# EAGLE board CT_schematic (EAGLE 7.6.0)

Size 100 x 80 mm. Coordinates in mm from the lower left corner, seen from the top.
Outline: 0,0 100,0 100,80 0,80 0,0
Copper layers (1*16): Top 0.035mm / dielectric 1.5mm / Bottom 0.035mm
Design rules "default": minimum track width 10mil, minimum drill 24mil, track to track 8mil, track to pad 8mil, pad to pad 8mil, via to via 8mil, smd to smd 8mil, copper to edge 40mil, drill to drill 8mil, minimum pad ring 10mil, minimum via ring 8mil, stop-mask expansion 4mil, vias tented up to drill 0mil, thermal gap 10mil

## Footprints (pad centres in the part's own frame; a part is rotated, then mirrored left to right if it is on the bottom)
C0603 = smd 0.8 x 0.8: 1 -0.762,0; 2 0.762,0
C0402 = smd 0.5 x 0.5: 1 -0.508,0; 2 0.508,0
C0805 = smd 1.2 x 1.3: 1 -1.016,0; 2 1.016,0
C1210 = smd 1.2 x 2.5: 1 -1.524,0; 2 1.524,0
EXV-9H = smd 3.505 x 1.676: 1 -2.857,0; 2 2.857,0
L0603 = smd 0.8 x 0.8: 1 -0.762,0; 2 0.762,0
PJ-037B_PACKAGE = drill 3.7 square: 1 12,0 | drill 3.2 square: 2 6,0
R0603 = smd 0.8 x 0.8: 1 -0.762,0; 2 0.762,0
LQFP100 = smd 0.3 x 1.2: 1 -6,-7.75; 2 -5.5,-7.75; 3 -5,-7.75; 4 -4.5,-7.75; 5 -4,-7.75; 6 -3.5,-7.75; 7 -3,-7.75; 8 -2.5,-7.75; 9 -2,-7.75; 10 -1.5,-7.75; 11 -1,-7.75; 12 -0.5,-7.75; 13 0,-7.75; 14 0.5,-7.75; 15 1,-7.75; 16 1.5,-7.75; 17 2,-7.75; 18 2.5,-7.75; 19 3,-7.75; 20 3.5,-7.75; 21 4,-7.75; 22 4.5,-7.75; 23 5,-7.75; 24 5.5,-7.75; 25 6,-7.75; 51 6,7.75; 52 5.5,7.75; 53 5,7.75; 54 4.5,7.75; 55 4,7.75; 56 3.5,7.75; 57 3,7.75; 58 2.5,7.75; 59 2,7.75; 60 1.5,7.75; 61 1,7.75; 62 0.5,7.75; 63 0,7.75; 64 -0.5,7.75; 65 -1,7.75; 66 -1.5,7.75; 67 -2,7.75; 68 -2.5,7.75; 69 -3,7.75; 70 -3.5,7.75; 71 -4,7.75; 72 -4.5,7.75; 73 -5,7.75; 74 -5.5,7.75; 75 -6,7.75 | smd 1.2 x 0.3: 26 7.75,-6; 27 7.75,-5.5; 28 7.75,-5; 29 7.75,-4.5; 30 7.75,-4; 31 7.75,-3.5; 32 7.75,-3; 33 7.75,-2.5; 34 7.75,-2; 35 7.75,-1.5; 36 7.75,-1; 37 7.75,-0.5; 38 7.75,0; 39 7.75,0.5; 40 7.75,1; 41 7.75,1.5; 42 7.75,2; 43 7.75,2.5; 44 7.75,3; 45 7.75,3.5; 46 7.75,4; 47 7.75,4.5; 48 7.75,5; 49 7.75,5.5; 50 7.75,6; 76 -7.75,6; 77 -7.75,5.5; 78 -7.75,5; 79 -7.75,4.5; 80 -7.75,4; 81 -7.75,3.5; 82 -7.75,3; 83 -7.75,2.5; 84 -7.75,2; 85 -7.75,1.5; 86 -7.75,1; 87 -7.75,0.5; 88 -7.75,0; 89 -7.75,-0.5; 90 -7.75,-1; 91 -7.75,-1.5; 92 -7.75,-2; 93 -7.75,-2.5; 94 -7.75,-3; 95 -7.75,-3.5; 96 -7.75,-4; 97 -7.75,-4.5; 98 -7.75,-5; 99 -7.75,-5.5; 100 -7.75,-6
SOIC-8 = smd 1.6 x 0.6: 1 -2.7,1.905 | smd 1.55 x 0.6: 2 -2.7,0.635; 3 -2.7,-0.635; 4 -2.7,-1.905; 5 2.7,-1.905; 6 2.7,-0.635; 7 2.7,0.635; 8 2.7,1.905
10100565 = smd 0.8 x 2.35: 1 0,0; 2 1.25,0; 3 2.55,0; 4 4.25,0; 5 5.43,0; 6 6.68,0; 7 7.93,0; 8 9.18,0; 9 11.67,0; 10 14.18,0; 11 15.43,0; 12 16.68,0; 13 17.93,0; 14 19.18,0; 15 21.68,0 | smd 1.5 x 3.1: 16 23.495,-1.375; 20 25.685,-22.875 | smd 1.55 x 3.1: 17 -1.815,-1.375; 21 -1.815,-22.875 | drill 1.1 pad 1.1: 18 21.68,-2.375; 19 0.68,-2.375
ATBTLC1000-MR110CA = smd 2 x 0.5: 1 -7.2,2.7; 2 -7.2,1.8; 3 -7.2,0.9; 4 -7.2,0; 5 -7.2,-0.9; 6 -7.2,-1.8; 7 -7.2,-2.7; 8 -7.2,-3.6; 17 3.6,-3.6; 18 3.6,-2.7; 19 3.6,-1.8; 20 3.6,-0.9; 21 3.6,0; 22 3.6,0.9; 23 3.6,1.8; 24 3.6,2.7 | smd 0.5 x 2: 9 -4.255,-6.824; 10 -3.355,-6.824; 11 -2.455,-6.824; 12 -1.555,-6.824; 13 -0.655,-6.824; 14 0.245,-6.824; 15 1.145,-6.824; 16 2.045,-6.824 | smd 2.7 x 2.7: 25 -1.261,-0.328
VFBGA-63 = smd 0.4 x 0.4: A1 -3.6,4.4; A2 -2.8,4.4; A9 2.8,4.4; A10 3.6,4.4; B1 -3.6,3.6; B9 2.8,3.6; B10 3.6,3.6; C3 -2,2.8; C4 -1.2,2.8; C5 -0.4,2.8; C6 0.4,2.8; C7 1.2,2.8; C8 2,2.8; D3 -2,2; D4 -1.2,2; D5 -0.4,2; D6 0.4,2; D7 1.2,2; D8 2,2; E3 -2,1.2; E4 -1.2,1.2; E5 -0.4,1.2; E6 0.4,1.2; E7 1.2,1.2; E8 2,1.2; F3 -2,0.4; F4 -1.2,0.4; F5 -0.4,0.4; F6 0.4,0.4; F7 1.2,0.4; F8 2,0.4; G3 -2,-0.4; G4 -1.2,-0.4; G5 -0.4,-0.4; G6 0.4,-0.4; G7 1.2,-0.4; G8 2,-0.4; H3 -2,-1.2; H4 -1.2,-1.2; H5 -0.4,-1.2; H6 0.4,-1.2; H7 1.2,-1.2; H8 2,-1.2; J3 -2,-2; J4 -1.2,-2; J5 -0.4,-2; J6 0.4,-2; J7 1.2,-2; J8 2,-2; K3 -2,-2.8; K4 -1.2,-2.8; K5 -0.4,-2.8; K6 0.4,-2.8; K7 1.2,-2.8; K8 2,-2.8; L1 -3.6,-3.6; L2 -2.8,-3.6; L9 2.8,-3.6; L10 3.6,-3.6; M1 -3.6,-4.4; M2 -2.8,-4.4; M9 2.8,-4.4; M10 3.6,-4.4
ABS07-32.768KHZ-7-T = smd 1.1 x 2.4: 1 -2.5,0; 2 0,0
ASFL1 = smd 1.7 x 1.5: 1 -1.27,-1.1; 2 1.27,-1.1; 3 1.27,1.1; 4 -1.27,1.1
WSON-8 = smd 0.3 x 0.6: 1 -0.75,0; 2 0.05,0; 3 0.85,0; 4 1.65,0; 5 1.65,3.8; 6 0.85,3.8; 7 0.05,3.8; 8 -0.75,3.8 | smd 3 x 2.6: PAD 0.45,1.9
SON-6 = smd 0.55 x 0.3: 1 -0.355,0.5 | smd 0.52 x 0.3: 2 -0.37,0; 3 -0.37,-0.5; 4 0.37,-0.5; 5 0.37,0; 6 0.37,0.5
SW_4-1437565-2 = smd 1.4 x 2.1: 1 -2.23,4.55; 2 -2.23,-4.55; 3 2.23,4.55; 4 2.23,-4.55
LGM67K-G1J2-24-Z = smd 0.8 x 1.4: A -2,0; C 0,0
NC7SZ125M5X = smd 1.3 x 0.7: 1 -1.3,0.95; 2 -1.3,0; 3 -1.3,-0.95; 4 1.3,-0.95; 5 1.3,0.95

## Placement (x,y rotation side)
C1  1e-06  [C0603]  -44.45,77.47 0 top  (outside the outline)
C2  1e-07  [C0603]  -48.26,77.47 0 top  (outside the outline)
C3  1e-07  [C0603]  -52.07,77.47 0 top  (outside the outline)
C4  1e-07  [C0603]  -55.88,77.47 0 top  (outside the outline)
C5  1e-07  [C0603]  -59.69,77.47 0 top  (outside the outline)
C6  1e-07  [C0603]  -63.5,77.47 0 top  (outside the outline)
C7  1e-07  [C0603]  -67.31,77.47 0 top  (outside the outline)
C8  4.7e-06  [C0603]  -29.21,77.47 0 top  (outside the outline)
C9  2.2e-06  [C0603]  -33.02,77.47 0 top  (outside the outline)
C10  2.2e-06  [C0603]  -36.83,77.47 0 top  (outside the outline)
C11  1e-08  [C0603]  -71.12,77.47 0 top  (outside the outline)
C12  1e-06  [C0603]  -74.93,77.47 0 top  (outside the outline)
C13  1e-11  [C0402]  -38.1,82.55 0 top  (outside the outline)
C14  1e-11  [C0402]  -41.91,82.55 0 top  (outside the outline)
C15  1e-08  [C0402]  -45.72,82.55 0 top  (outside the outline)
C16  1e-07  [C0402]  -49.53,82.55 0 top  (outside the outline)
C17  1e-05  [C0805]  -77.47,59.69 0 top  (outside the outline)
C18  1e-05  [C0805]  -15.24,67.31 0 top  (outside the outline)
C19  1e-05  [C0805]  -20.32,67.31 0 top  (outside the outline)
C20  1e-07  [C0402]  -53.34,82.55 0 top  (outside the outline)
C21  1e-07  [C0402]  -57.15,82.55 0 top  (outside the outline)
C22  1e-07  [C0402]  -60.96,82.55 0 top  (outside the outline)
C23  1e-07  [C0402]  -64.77,82.55 0 top  (outside the outline)
C24  2.2e-06  [C0603]  -40.64,77.47 0 top  (outside the outline)
C25  1e-08  [C0402]  -68.58,82.55 0 top  (outside the outline)
C26  1e-08  [C0402]  -72.39,82.55 0 top  (outside the outline)
C27  1e-05  [C1210]  -59.69,59.69 0 top  (outside the outline)
C28  1e-05  [C1210]  -66.04,59.69 0 top  (outside the outline)
C29  1e-07  [C0402]  -76.2,82.55 0 top  (outside the outline)
C30  0.0001  [EXV-9H]  -71.12,50.8 0 top  (outside the outline)
C31  0.0001  [EXV-9H]  -17.78,60.96 0 top  (outside the outline)
C32  1e-08  [C0402]  -15.24,87.63 0 top  (outside the outline)
F1  240.0  [L0603]  -15.24,82.55 0 top  (outside the outline)
J1  PJ-037B  [PJ-037B_PACKAGE]  -48.26,36.83 0 top  (outside the outline)
R2  1000.0  [R0603]  -19.05,82.55 0 top  (outside the outline)
R4  4700.0  [R0603]  -22.86,82.55 0 top  (outside the outline)
R5  10000.0  [R0603]  -30.48,72.39 0 top  (outside the outline)
R6  10000.0  [R0603]  -35.56,72.39 0 top  (outside the outline)
R7  10000.0  [R0603]  -40.64,72.39 0 top  (outside the outline)
R8  10000.0  [R0603]  -45.72,72.39 0 top  (outside the outline)
R9  100000.0  [R0603]  -25.4,67.31 0 top  (outside the outline)
R10  100000.0  [R0603]  -30.48,67.31 0 top  (outside the outline)
R11  100000.0  [R0603]  -35.56,67.31 0 top  (outside the outline)
R12  100000.0  [R0603]  -40.64,67.31 0 top  (outside the outline)
R13  100000.0  [R0603]  -45.72,67.31 0 top  (outside the outline)
R14  100000.0  [R0603]  -50.8,67.31 0 top  (outside the outline)
R15  100000.0  [R0603]  -55.88,67.31 0 top  (outside the outline)
R16  100000.0  [R0603]  -60.96,67.31 0 top  (outside the outline)
R17  100000.0  [R0603]  -66.04,67.31 0 top  (outside the outline)
R18  100000.0  [R0603]  -71.12,67.31 0 top  (outside the outline)
R19  100000.0  [R0603]  -76.2,67.31 0 top  (outside the outline)
R20  10000.0  [R0603]  -50.8,72.39 0 top  (outside the outline)
R21  10000.0  [R0603]  -55.88,72.39 0 top  (outside the outline)
R22  10000.0  [R0603]  -60.96,72.39 0 top  (outside the outline)
R23  10000.0  [R0603]  -66.04,72.39 0 top  (outside the outline)
R24  10000.0  [R0603]  -71.12,72.39 0 top  (outside the outline)
R25  10000.0  [R0603]  -76.2,72.39 0 top  (outside the outline)
R26  10000.0  [R0603]  -15.24,77.47 0 top  (outside the outline)
R27  100000.0  [R0603]  -15.24,72.39 0 top  (outside the outline)
R28  2231.0  [R0603]  -26.67,82.55 0 top  (outside the outline)
R29  1000.0  [R0603]  -30.48,82.55 0 top  (outside the outline)
R30  10000.0  [R0603]  -20.32,77.47 0 top  (outside the outline)
R31  10000.0  [R0603]  -25.4,77.47 0 top  (outside the outline)
R32  9100.0  [R0603]  -34.29,82.55 0 top  (outside the outline)
R33  680000.0  [R0603]  -20.32,72.39 0 top  (outside the outline)
R34  120000.0  [R0603]  -25.4,72.39 0 top  (outside the outline)
U1  STM32F207VFT6  [LQFP100]  -24.13,38.1 0 top  (outside the outline)
U2  AT25160B-SSHL-T  [SOIC-8]  -24.13,52.07 0 top  (outside the outline)
U3  10100565  [10100565]  -40.64,25.4 0 top  (outside the outline)
U4  ATBTLC1000-MR110CA  [ATBTLC1000-MR110CA]  -49.53,8.89 0 top  (outside the outline)
U5  mt29f4g08abadah4  [VFBGA-63]  -54.61,35.56 0 top  (outside the outline)
U6  ABS07-32.768KHZ-7-T  [ABS07-32.768KHZ-7-T]  -39.37,60.96 0 top  (outside the outline)
U7  ASFL1-25MHZ-NCS  [ASFL1]  -62.23,52.07 0 top  (outside the outline)
U8  LP3878SDX-ADJ/NOPB  [WSON-8]  -45.72,49.53 0 top  (outside the outline)
U9  TPS3895ADRYR  [SON-6]  -17.78,86.36 0 top  (outside the outline)
U10  4-1437565-2  [SW_4-1437565-2]  -74.93,35.56 0 top  (outside the outline)
U11  Q65110A2395  [LGM67K-G1J2-24-Z]  -48.26,59.69 0 top  (outside the outline)
U12  nc7sz125m5x  [NC7SZ125M5X]  -71.12,58.42 0 top  (outside the outline)

## Library data of the parts
C1-C32 F1 J1 R2 R4-R34 U1-U12 = circuit_tree

## Nets
CLK_CRYSTAL_U1_8: C13.1 U1.8 U6.1
CLK_CRYSTAL_U1_9: C14.1 U1.9 U6.2
CLK_U1_12: U1.12 U7.3
GND: C1.2 C2.2 C3.2 C4.2 C5.2 C6.2 C7.2 C8.2 C9.2 C10.2 C11.2 C12.2 C13.2 C14.2 C15.2 C16.2 C17.2 C18.2 C19.2 C20.2 C21.2 C22.2 C23.2 C24.2 C25.2 C26.2 C27.2 C28.2 C29.2 C30.2 C31.2 C32.2 J1.2 R2.2 R5.2 R29.2 R32.2 R34.2 U1.10 U1.20 U1.27 U1.74 U2.4 U3.6 U3.10 U3.12 U3.16 U3.17 U3.20 U3.21 U4.1 U4.9 U4.13 U4.24 U4.25 U5.C5 U5.F7 U5.K3 U5.K8 U7.2 U8.3 U8.PAD U9.2 U11.C U12.1 U12.3
NET_U1_14: R4.1 U1.14 U12.4
NET_U1_22: C11.1 C12.1 F1.1 U1.21 U1.22
NET_U1_49: C9.1 U1.49
NET_U1_73: C10.1 U1.73
NET_U1_94: R5.1 U1.94
NET_U1_97: U11.A
NET_U1_98: U10.3 U10.4
NET_U2_3: R6.1 U2.3
NET_U2_7: R8.1 U2.7
NET_U3_1: R11.1 U3.1
NET_U3_2: R10.1 U3.2
NET_U3_18: U3.18 U3.19
NET_U4_17: R20.1 U4.17
NET_U4_20: R21.1 U4.20
NET_U5_C3: R26.1 U5.C3
NET_U8_1: C26.1 U8.1
NET_U8_6: R28.2 R29.1 U8.6
NET_U8_8: R27.1 U8.8
NET_U9_1: R31.1 R32.1 U9.1
NET_U9_3: R33.2 R34.1 U9.3
NET_U9_4: R30.1 U9.4 U12.2
NET_U10_1: R2.1 U10.1 U10.2
PROC_FSMC_D0: U1.61 U5.H4
PROC_FSMC_D1: U1.62 U5.J4
PROC_FSMC_D2: U1.81 U5.K4
PROC_FSMC_D3: U1.82 U5.K5
PROC_FSMC_D4: U1.38 U5.K6
PROC_FSMC_D5: U1.39 U5.J7
PROC_FSMC_D6: U1.40 U5.K7
PROC_FSMC_D7: U1.41 U5.J8
PROC_FSMC_NCE2: R23.1 U1.88 U5.C6
PROC_FSMC_NOE: R25.1 U1.85 U5.D4
PROC_FSMC_NWAIT: R22.1 U1.87 U5.C8
PROC_FSMC_NWE: R24.1 U1.86 U5.C7
PROC_SDIO_CK: R9.1 U1.80 U3.8
PROC_SDIO_D0: R12.1 U1.65 U3.4
PROC_SDIO_D1: R13.1 U1.66 U3.3
PROC_SDIO_D2: R14.1 U1.78 U3.15
PROC_SDIO_D3: R15.1 U1.79 U3.14
PROC_SDIO_D4: R16.1 U1.95 U3.13
PROC_SDIO_D5: R17.1 U1.96 U3.11
PROC_SDIO_D6: R18.1 U1.63 U3.7
PROC_SDIO_D7: R19.1 U1.64 U3.5
PROC_SPI1_MISO: U1.31 U4.14
PROC_SPI1_MOSI: U1.32 U4.11
PROC_SPI1_NSS: U1.29 U4.12
PROC_SPI1_SCK: U1.30 U4.10
PROC_SPI2_MISO: U2.2
PROC_SPI2_MOSI: U2.5
PROC_SPI2_NSS: R7.1 U2.1
PROC_SPI2_SCK: U2.6
VCC_S1_15V8: C27.1 C30.1 C31.1 J1.1 R27.2 U8.4
VCC_TIER1_3V3: C1.1 C2.1 C3.1 C4.1 C5.1 C6.1 C7.1 C8.1 C15.1 C16.1 C17.1 C18.1 C19.1 C20.1 C21.1 C22.1 C23.1 C24.1 C25.1 C28.1 C29.1 C32.1 F1.2 R4.2 R6.2 R7.2 R8.2 R9.2 R10.2 R11.2 R12.2 R13.2 R14.2 R15.2 R16.2 R17.2 R18.2 R19.2 R20.2 R21.2 R22.2 R23.2 R24.2 R25.2 R26.2 R28.1 R30.2 R31.2 R33.1 U1.6 U1.11 U1.19 U1.28 U1.50 U1.75 U1.100 U2.8 U3.9 U4.6 U4.22 U5.D3 U5.G4 U5.H8 U5.J6 U7.4 U8.5 U9.6 U12.5

## Tracks (layer width: path | path; a pad name or v marks a point on that pad's centre or on a via)
CLK_CRYSTAL_U1_8  (2 unrouted)
CLK_CRYSTAL_U1_9  (2 unrouted)
CLK_U1_12  (1 unrouted)
GND  (65 unrouted)
NET_U1_14  (2 unrouted)
NET_U1_22  (4 unrouted)
NET_U1_49  (1 unrouted)
NET_U1_73  (1 unrouted)
NET_U1_94  (1 unrouted)
NET_U1_98  (1 unrouted)
NET_U2_3  (1 unrouted)
NET_U2_7  (1 unrouted)
NET_U3_1  (1 unrouted)
NET_U3_2  (1 unrouted)
NET_U3_18  (1 unrouted)
NET_U4_17  (1 unrouted)
NET_U4_20  (1 unrouted)
NET_U5_C3  (1 unrouted)
NET_U8_1  (1 unrouted)
NET_U8_6  (2 unrouted)
NET_U8_8  (1 unrouted)
NET_U9_1  (2 unrouted)
NET_U9_3  (2 unrouted)
NET_U9_4  (2 unrouted)
NET_U10_1  (2 unrouted)
PROC_FSMC_D0  (1 unrouted)
PROC_FSMC_D1  (1 unrouted)
PROC_FSMC_D2  (1 unrouted)
PROC_FSMC_D3  (1 unrouted)
PROC_FSMC_D4  (1 unrouted)
PROC_FSMC_D5  (1 unrouted)
PROC_FSMC_D6  (1 unrouted)
PROC_FSMC_D7  (1 unrouted)
PROC_FSMC_NCE2  (2 unrouted)
PROC_FSMC_NOE  (2 unrouted)
PROC_FSMC_NWAIT  (2 unrouted)
PROC_FSMC_NWE  (2 unrouted)
PROC_SDIO_CK  (2 unrouted)
PROC_SDIO_D0  (2 unrouted)
PROC_SDIO_D1  (2 unrouted)
PROC_SDIO_D2  (2 unrouted)
PROC_SDIO_D3  (2 unrouted)
PROC_SDIO_D4  (2 unrouted)
PROC_SDIO_D5  (2 unrouted)
PROC_SDIO_D6  (2 unrouted)
PROC_SDIO_D7  (2 unrouted)
PROC_SPI1_MISO  (1 unrouted)
PROC_SPI1_MOSI  (1 unrouted)
PROC_SPI1_NSS  (1 unrouted)
PROC_SPI1_SCK  (1 unrouted)
PROC_SPI2_NSS  (1 unrouted)
VCC_S1_15V8  (5 unrouted)
VCC_TIER1_3V3  (67 unrouted)